# EAGLE board MyoWare_Cable_Shield.panel (EAGLE 7.4.0)
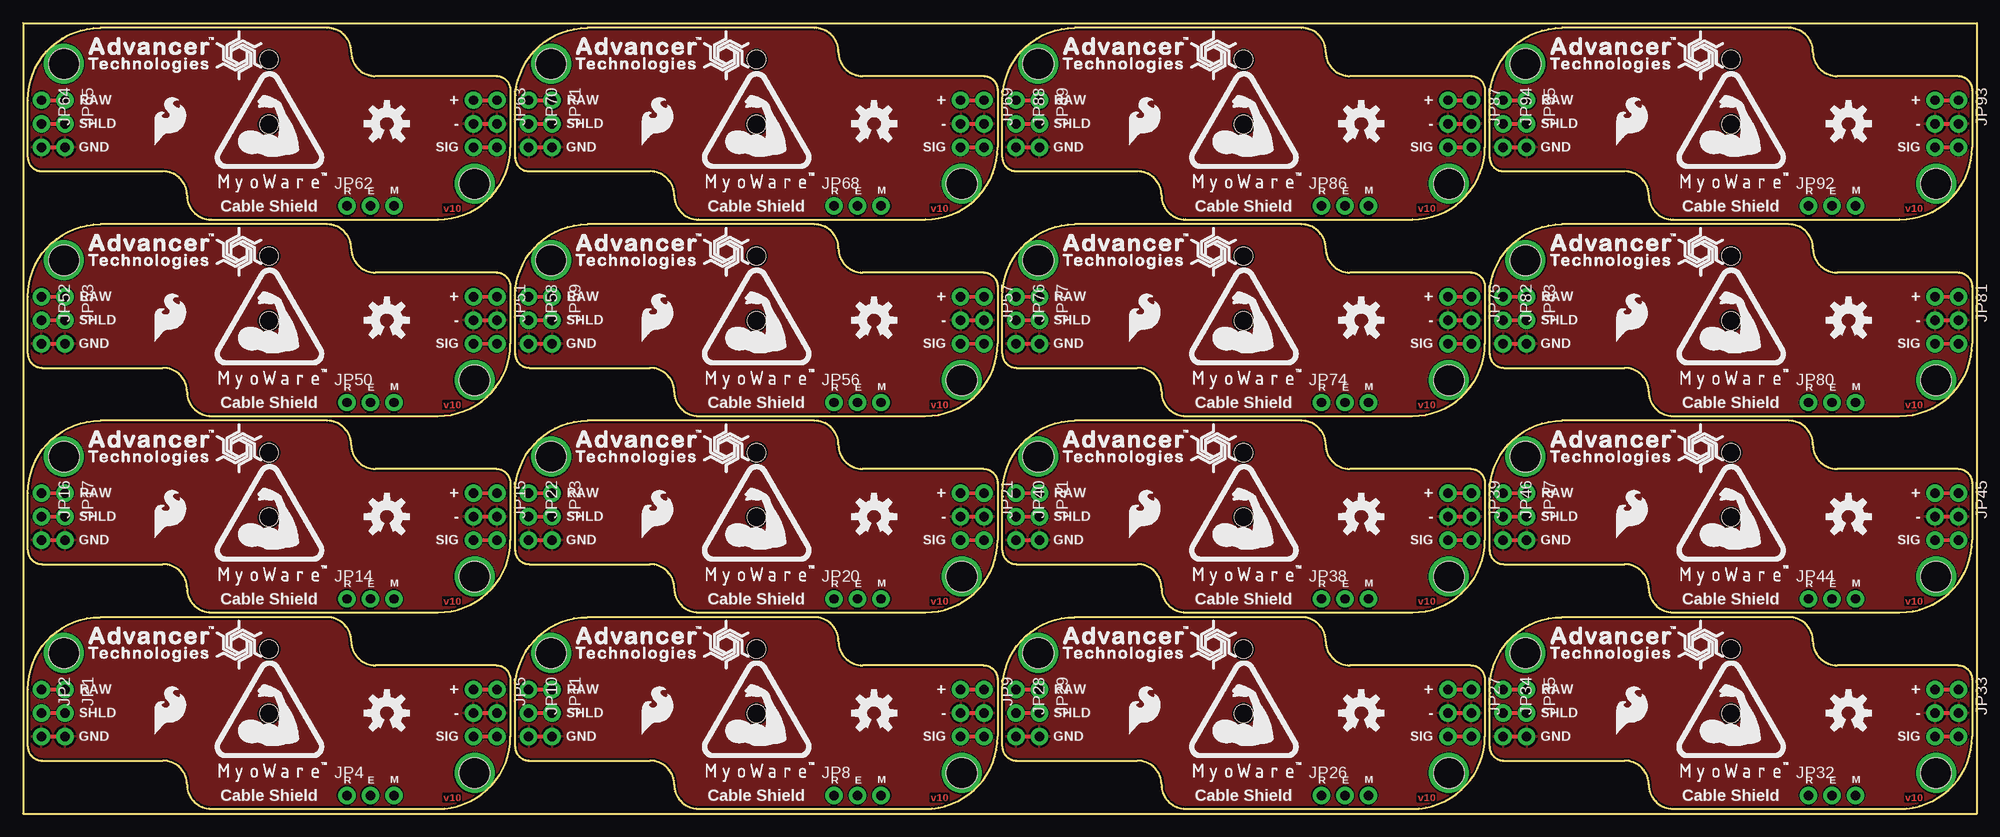
[diagram p0: board, top side]
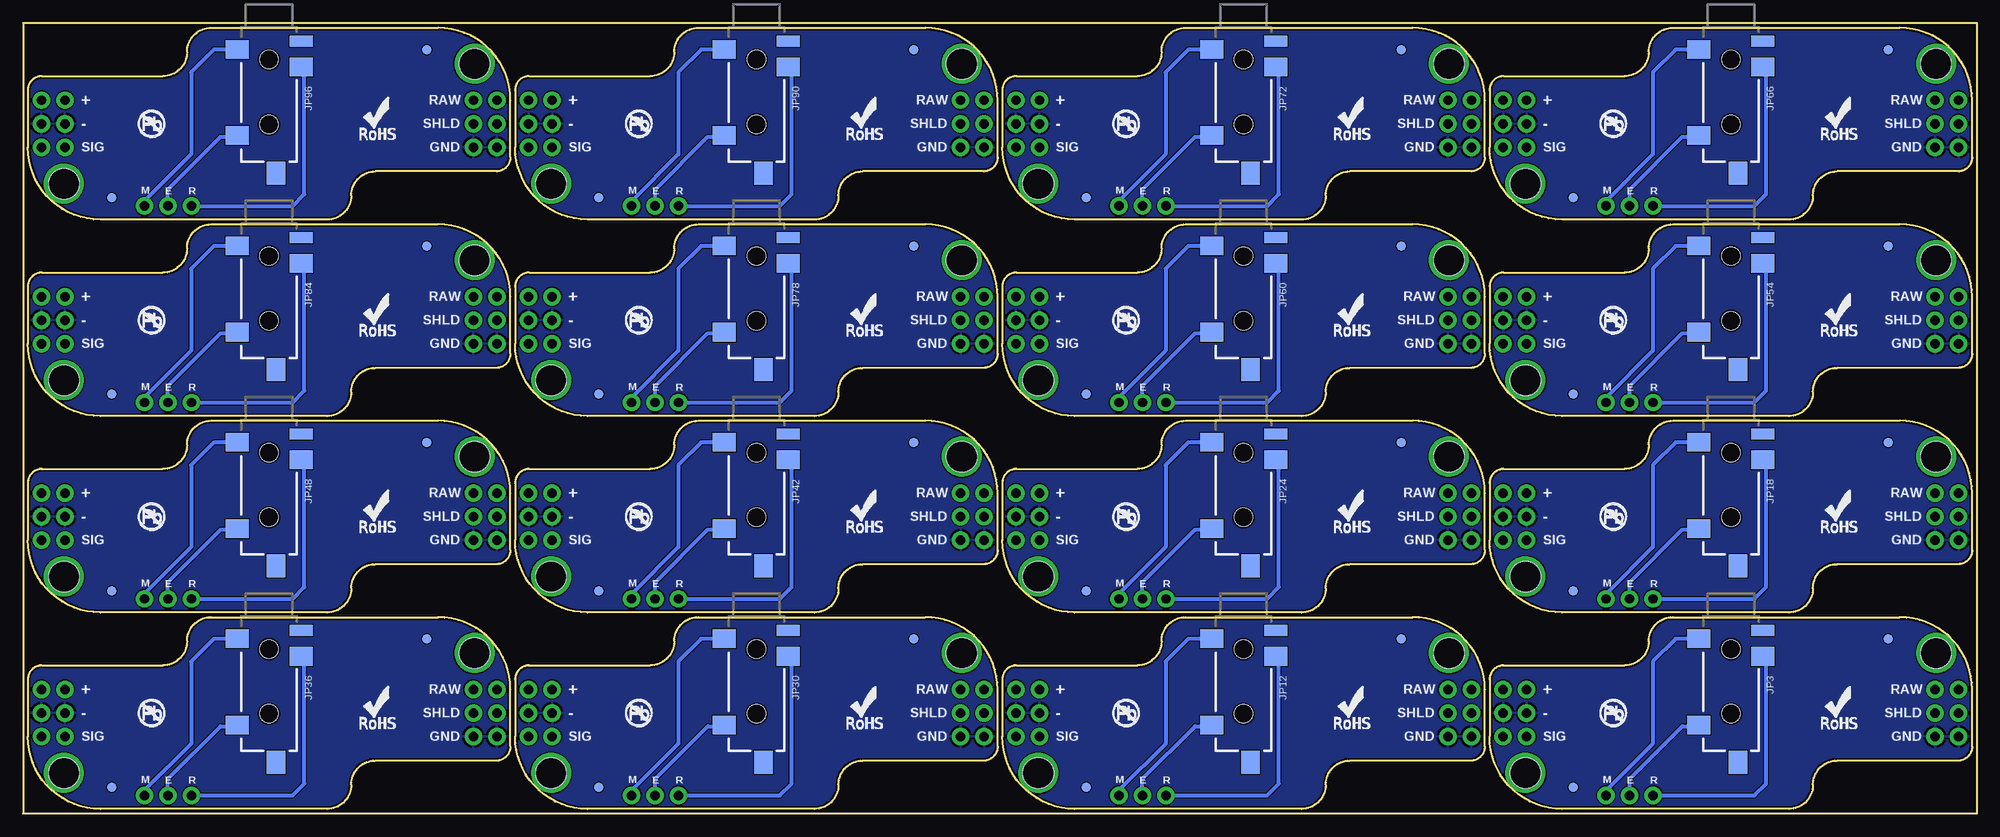
[diagram p1: board, bottom side, seen from below]

Size 210.82 x 85.34 mm. Coordinates in mm from the lower left corner, seen from the top.
Outline: 20.29,0.51 44.77,0.51 arc90 52.58,8.32 52.58,14.48 arc90 51.05,16 38,16 arc-90 35.4,18.61 arc90 32.8,21.21 8.32,21.21 arc90 0.51,13.4 0.51,7.24 arc90 2.03,5.71 15.08,5.71 arc-90 17.68,3.11 arc90 20.29,0.51
Outline: 72.87,0.51 97.34,0.51 arc90 105.16,8.32 105.16,14.48 arc90 103.63,16 90.58,16 arc-90 87.98,18.61 arc90 85.38,21.21 60.9,21.21 arc90 53.09,13.4 53.09,7.24 arc90 54.61,5.71 67.66,5.71 arc-90 70.26,3.11 arc90 72.87,0.51
Outline: 20.29,21.72 44.77,21.72 arc90 52.58,29.53 52.58,35.69 arc90 51.05,37.21 38,37.21 arc-90 35.4,39.81 arc90 32.8,42.42 8.32,42.42 arc90 0.51,34.61 0.51,28.45 arc90 2.03,26.92 15.08,26.92 arc-90 17.68,24.32 arc90 20.29,21.72
Outline: 72.87,21.72 97.34,21.72 arc90 105.16,29.53 105.16,35.69 arc90 103.63,37.21 90.58,37.21 arc-90 87.98,39.81 arc90 85.38,42.42 60.9,42.42 arc90 53.09,34.61 53.09,28.45 arc90 54.61,26.92 67.66,26.92 arc-90 70.26,24.32 arc90 72.87,21.72
Outline: 125.44,0.51 149.92,0.51 arc90 157.73,8.32 157.73,14.48 arc90 156.21,16 143.16,16 arc-90 140.56,18.61 arc90 137.95,21.21 113.47,21.21 arc90 105.66,13.4 105.66,7.24 arc90 107.19,5.71 120.24,5.71 arc-90 122.84,3.11 arc90 125.44,0.51
Outline: 178.02,0.51 202.5,0.51 arc90 210.31,8.32 210.31,14.48 arc90 208.79,16 195.74,16 arc-90 193.14,18.61 arc90 190.53,21.21 166.05,21.21 arc90 158.24,13.4 158.24,7.24 arc90 159.77,5.71 172.81,5.71 arc-90 175.42,3.11 arc90 178.02,0.51
Outline: 125.44,21.72 149.92,21.72 arc90 157.73,29.53 157.73,35.69 arc90 156.21,37.21 143.16,37.21 arc-90 140.56,39.81 arc90 137.95,42.42 113.47,42.42 arc90 105.66,34.61 105.66,28.45 arc90 107.19,26.92 120.24,26.92 arc-90 122.84,24.32 arc90 125.44,21.72
Outline: 178.02,21.72 202.5,21.72 arc90 210.31,29.53 210.31,35.69 arc90 208.79,37.21 195.74,37.21 arc-90 193.14,39.81 arc90 190.53,42.42 166.05,42.42 arc90 158.24,34.61 158.24,28.45 arc90 159.77,26.92 172.81,26.92 arc-90 175.42,24.32 arc90 178.02,21.72
Outline: 20.29,42.93 44.77,42.93 arc90 52.58,50.74 52.58,56.9 arc90 51.05,58.42 38,58.42 arc-90 35.4,61.02 arc90 32.8,63.63 8.32,63.63 arc90 0.51,55.82 0.51,49.66 arc90 2.03,48.13 15.08,48.13 arc-90 17.68,45.53 arc90 20.29,42.93
Outline: 72.87,42.93 97.34,42.93 arc90 105.16,50.74 105.16,56.9 arc90 103.63,58.42 90.58,58.42 arc-90 87.98,61.02 arc90 85.38,63.63 60.9,63.63 arc90 53.09,55.82 53.09,49.66 arc90 54.61,48.13 67.66,48.13 arc-90 70.26,45.53 arc90 72.87,42.93
Outline: 20.29,64.13 44.77,64.13 arc90 52.58,71.95 52.58,78.1 arc90 51.05,79.63 38,79.63 arc-90 35.4,82.23 arc90 32.8,84.84 8.32,84.84 arc90 0.51,77.03 0.51,70.87 arc90 2.03,69.34 15.08,69.34 arc-90 17.68,66.74 arc90 20.29,64.13
Outline: 72.87,64.13 97.34,64.13 arc90 105.16,71.95 105.16,78.1 arc90 103.63,79.63 90.58,79.63 arc-90 87.98,82.23 arc90 85.38,84.84 60.9,84.84 arc90 53.09,77.03 53.09,70.87 arc90 54.61,69.34 67.66,69.34 arc-90 70.26,66.74 arc90 72.87,64.13
Outline: 125.44,42.93 149.92,42.93 arc90 157.73,50.74 157.73,56.9 arc90 156.21,58.42 143.16,58.42 arc-90 140.56,61.02 arc90 137.95,63.63 113.47,63.63 arc90 105.66,55.82 105.66,49.66 arc90 107.19,48.13 120.24,48.13 arc-90 122.84,45.53 arc90 125.44,42.93
Outline: 178.02,42.93 202.5,42.93 arc90 210.31,50.74 210.31,56.9 arc90 208.79,58.42 195.74,58.42 arc-90 193.14,61.02 arc90 190.53,63.63 166.05,63.63 arc90 158.24,55.82 158.24,49.66 arc90 159.77,48.13 172.81,48.13 arc-90 175.42,45.53 arc90 178.02,42.93
Outline: 125.44,64.13 149.92,64.13 arc90 157.73,71.95 157.73,78.1 arc90 156.21,79.63 143.16,79.63 arc-90 140.56,82.23 arc90 137.95,84.84 113.47,84.84 arc90 105.66,77.03 105.66,70.87 arc90 107.19,69.34 120.24,69.34 arc-90 122.84,66.74 arc90 125.44,64.13
Outline: 178.02,64.13 202.5,64.13 arc90 210.31,71.95 210.31,78.1 arc90 208.79,79.63 195.74,79.63 arc-90 193.14,82.23 arc90 190.53,84.84 166.05,84.84 arc90 158.24,77.03 158.24,70.87 arc90 159.77,69.34 172.81,69.34 arc-90 175.42,66.74 arc90 178.02,64.13
Outline: 0,85.34 0,0 210.82,0 210.82,85.34 0,85.34
Copper layers (1*16): Top 0.035mm / dielectric 1.5mm / Bottom 0.035mm
Design rules "Gold_Phoenix_Standard_Spec_2_layer": minimum track width 5mil, minimum drill 6mil, track to track 5mil, track to pad 5mil, pad to pad 5mil, via to via 5mil, smd to smd 5mil, copper to edge 8mil, drill to drill 8mil, minimum pad ring 5mil, minimum via ring 5mil, stop-mask expansion 4mil, vias tented up to drill 20mil, thermal gap 10mil

## Footprints (pad centres in the part's own frame; a part is rotated, then mirrored left to right if it is on the bottom)
FIDUCIAL-1X2 = smd 1 x 1: 1 0,0
1X03_NO_SILK = drill 1.016 pad 1.88: 1 0,0; 2 2.54,0; 3 5.08,0
AUDIO-JACK-3.5MM-SMD = smd 2 x 2.5: RING 4.3,3.45; SLEEVE 2.4,-3.45; TIP 11.7,-3.45 | smd 1.2 x 2.5: RSH 1.5,3.45 | smd 2.5 x 2: TSH 15.75,0.75 | hole 2: 3.5,0; 10.5,0
STAND-OFF = hole 3.302: 0,0

## Placement (x,y rotation side)
FID1  FIDUCIAL1X2  [FIDUCIAL-1X2]  43.54,2.86 0 bottom
FID2  FIDUCIAL1X2  [FIDUCIAL-1X2]  9.54,18.86 0 bottom
FID3  FIDUCIAL1X2  [FIDUCIAL-1X2]  62.12,18.86 0 bottom
FID4  FIDUCIAL1X2  [FIDUCIAL-1X2]  96.12,2.86 0 bottom
FID5  FIDUCIAL1X2  [FIDUCIAL-1X2]  9.54,40.07 0 bottom
FID6  FIDUCIAL1X2  [FIDUCIAL-1X2]  43.54,24.07 0 bottom
FID7  FIDUCIAL1X2  [FIDUCIAL-1X2]  62.12,40.07 0 bottom
FID8  FIDUCIAL1X2  [FIDUCIAL-1X2]  96.12,24.07 0 bottom
FID9  FIDUCIAL1X2  [FIDUCIAL-1X2]  114.7,18.86 0 bottom
FID10  FIDUCIAL1X2  [FIDUCIAL-1X2]  148.7,2.86 0 bottom
FID11  FIDUCIAL1X2  [FIDUCIAL-1X2]  167.28,18.86 0 bottom
FID12  FIDUCIAL1X2  [FIDUCIAL-1X2]  201.28,2.86 0 bottom
FID13  FIDUCIAL1X2  [FIDUCIAL-1X2]  114.7,40.07 0 bottom
FID14  FIDUCIAL1X2  [FIDUCIAL-1X2]  148.7,24.07 0 bottom
FID15  FIDUCIAL1X2  [FIDUCIAL-1X2]  167.28,40.07 0 bottom
FID16  FIDUCIAL1X2  [FIDUCIAL-1X2]  201.28,24.07 0 bottom
FID17  FIDUCIAL1X2  [FIDUCIAL-1X2]  9.54,61.28 0 bottom
FID18  FIDUCIAL1X2  [FIDUCIAL-1X2]  43.54,45.28 0 bottom
FID19  FIDUCIAL1X2  [FIDUCIAL-1X2]  62.12,61.28 0 bottom
FID20  FIDUCIAL1X2  [FIDUCIAL-1X2]  96.12,45.28 0 bottom
FID21  FIDUCIAL1X2  [FIDUCIAL-1X2]  9.54,82.49 0 bottom
FID22  FIDUCIAL1X2  [FIDUCIAL-1X2]  43.54,66.49 0 bottom
FID23  FIDUCIAL1X2  [FIDUCIAL-1X2]  62.12,82.49 0 bottom
FID24  FIDUCIAL1X2  [FIDUCIAL-1X2]  96.12,66.49 0 bottom
FID25  FIDUCIAL1X2  [FIDUCIAL-1X2]  114.7,61.28 0 bottom
FID26  FIDUCIAL1X2  [FIDUCIAL-1X2]  148.7,45.28 0 bottom
FID27  FIDUCIAL1X2  [FIDUCIAL-1X2]  167.28,61.28 0 bottom
FID28  FIDUCIAL1X2  [FIDUCIAL-1X2]  201.28,45.28 0 bottom
FID29  FIDUCIAL1X2  [FIDUCIAL-1X2]  114.7,82.49 0 bottom
FID30  FIDUCIAL1X2  [FIDUCIAL-1X2]  148.7,66.49 0 bottom
FID31  FIDUCIAL1X2  [FIDUCIAL-1X2]  167.28,82.49 0 bottom
FID32  FIDUCIAL1X2  [FIDUCIAL-1X2]  201.28,66.49 0 bottom
FRAME1  FRAME-LETTER  [CREATIVE_COMMONS]  -5.21,-14.54 0 top  (outside the outline)
JP1  Power  [1X03_NO_SILK]  4.51,13.4 270 top
JP2  Power  [1X03_NO_SILK]  1.97,13.4 270 top
JP3  3.5mm Jack  [AUDIO-JACK-3.5MM-SMD]  26.54,21.27 270 bottom
JP4  Power  [1X03_NO_SILK]  34.92,1.97 0 top
JP5  Power  [1X03_NO_SILK]  51.12,13.4 270 top
JP6  Power  [1X03_NO_SILK]  48.58,13.4 270 top
JP7  Power  [1X03_NO_SILK]  101.16,13.4 270 top
JP8  Power  [1X03_NO_SILK]  87.5,1.97 0 top
JP9  Power  [1X03_NO_SILK]  103.7,13.4 270 top
JP10  Power  [1X03_NO_SILK]  54.55,13.4 270 top
JP11  Power  [1X03_NO_SILK]  57.09,13.4 270 top
JP12  3.5mm Jack  [AUDIO-JACK-3.5MM-SMD]  79.12,21.27 270 bottom
JP13  Power  [1X03_NO_SILK]  48.58,34.61 270 top
JP14  Power  [1X03_NO_SILK]  34.92,23.18 0 top
JP15  Power  [1X03_NO_SILK]  51.12,34.61 270 top
JP16  Power  [1X03_NO_SILK]  1.97,34.61 270 top
JP17  Power  [1X03_NO_SILK]  4.51,34.61 270 top
JP18  3.5mm Jack  [AUDIO-JACK-3.5MM-SMD]  26.54,42.48 270 bottom
JP19  Power  [1X03_NO_SILK]  101.16,34.61 270 top
JP20  Power  [1X03_NO_SILK]  87.5,23.18 0 top
JP21  Power  [1X03_NO_SILK]  103.7,34.61 270 top
JP22  Power  [1X03_NO_SILK]  54.55,34.61 270 top
JP23  Power  [1X03_NO_SILK]  57.09,34.61 270 top
JP24  3.5mm Jack  [AUDIO-JACK-3.5MM-SMD]  79.12,42.48 270 bottom
JP25  Power  [1X03_NO_SILK]  153.73,13.4 270 top
JP26  Power  [1X03_NO_SILK]  140.08,1.97 0 top
JP27  Power  [1X03_NO_SILK]  156.27,13.4 270 top
JP28  Power  [1X03_NO_SILK]  107.12,13.4 270 top
JP29  Power  [1X03_NO_SILK]  109.66,13.4 270 top
JP30  3.5mm Jack  [AUDIO-JACK-3.5MM-SMD]  131.7,21.27 270 bottom
JP31  Power  [1X03_NO_SILK]  206.31,13.4 270 top
JP32  Power  [1X03_NO_SILK]  192.66,1.97 0 top
JP33  Power  [1X03_NO_SILK]  208.85,13.4 270 top
JP34  Power  [1X03_NO_SILK]  159.7,13.4 270 top
JP35  Power  [1X03_NO_SILK]  162.24,13.4 270 top
JP36  3.5mm Jack  [AUDIO-JACK-3.5MM-SMD]  184.28,21.27 270 bottom
JP37  Power  [1X03_NO_SILK]  153.73,34.61 270 top
JP38  Power  [1X03_NO_SILK]  140.08,23.18 0 top
JP39  Power  [1X03_NO_SILK]  156.27,34.61 270 top
JP40  Power  [1X03_NO_SILK]  107.12,34.61 270 top
JP41  Power  [1X03_NO_SILK]  109.66,34.61 270 top
JP42  3.5mm Jack  [AUDIO-JACK-3.5MM-SMD]  131.7,42.48 270 bottom
JP43  Power  [1X03_NO_SILK]  206.31,34.61 270 top
JP44  Power  [1X03_NO_SILK]  192.66,23.18 0 top
JP45  Power  [1X03_NO_SILK]  208.85,34.61 270 top
JP46  Power  [1X03_NO_SILK]  159.7,34.61 270 top
JP47  Power  [1X03_NO_SILK]  162.24,34.61 270 top
JP48  3.5mm Jack  [AUDIO-JACK-3.5MM-SMD]  184.28,42.48 270 bottom
JP49  Power  [1X03_NO_SILK]  48.58,55.82 270 top
JP50  Power  [1X03_NO_SILK]  34.92,44.39 0 top
JP51  Power  [1X03_NO_SILK]  51.12,55.82 270 top
JP52  Power  [1X03_NO_SILK]  1.97,55.82 270 top
JP53  Power  [1X03_NO_SILK]  4.51,55.82 270 top
JP54  3.5mm Jack  [AUDIO-JACK-3.5MM-SMD]  26.54,63.69 270 bottom
JP55  Power  [1X03_NO_SILK]  101.16,55.82 270 top
JP56  Power  [1X03_NO_SILK]  87.5,44.39 0 top
JP57  Power  [1X03_NO_SILK]  103.7,55.82 270 top
JP58  Power  [1X03_NO_SILK]  54.55,55.82 270 top
JP59  Power  [1X03_NO_SILK]  57.09,55.82 270 top
JP60  3.5mm Jack  [AUDIO-JACK-3.5MM-SMD]  79.12,63.69 270 bottom
JP61  Power  [1X03_NO_SILK]  48.58,77.03 270 top
JP62  Power  [1X03_NO_SILK]  34.92,65.6 0 top
JP63  Power  [1X03_NO_SILK]  51.12,77.03 270 top
JP64  Power  [1X03_NO_SILK]  1.97,77.03 270 top
JP65  Power  [1X03_NO_SILK]  4.51,77.03 270 top
JP66  3.5mm Jack  [AUDIO-JACK-3.5MM-SMD]  26.54,84.9 270 bottom
JP67  Power  [1X03_NO_SILK]  101.16,77.03 270 top
JP68  Power  [1X03_NO_SILK]  87.5,65.6 0 top
JP69  Power  [1X03_NO_SILK]  103.7,77.03 270 top
JP70  Power  [1X03_NO_SILK]  54.55,77.03 270 top
JP71  Power  [1X03_NO_SILK]  57.09,77.03 270 top
JP72  3.5mm Jack  [AUDIO-JACK-3.5MM-SMD]  79.12,84.9 270 bottom
JP73  Power  [1X03_NO_SILK]  153.73,55.82 270 top
JP74  Power  [1X03_NO_SILK]  140.08,44.39 0 top
JP75  Power  [1X03_NO_SILK]  156.27,55.82 270 top
JP76  Power  [1X03_NO_SILK]  107.12,55.82 270 top
JP77  Power  [1X03_NO_SILK]  109.66,55.82 270 top
JP78  3.5mm Jack  [AUDIO-JACK-3.5MM-SMD]  131.7,63.69 270 bottom
JP79  Power  [1X03_NO_SILK]  206.31,55.82 270 top
JP80  Power  [1X03_NO_SILK]  192.66,44.39 0 top
JP81  Power  [1X03_NO_SILK]  208.85,55.82 270 top
JP82  Power  [1X03_NO_SILK]  159.7,55.82 270 top
JP83  Power  [1X03_NO_SILK]  162.24,55.82 270 top
JP84  3.5mm Jack  [AUDIO-JACK-3.5MM-SMD]  184.28,63.69 270 bottom
JP85  Power  [1X03_NO_SILK]  153.73,77.03 270 top
JP86  Power  [1X03_NO_SILK]  140.08,65.6 0 top
JP87  Power  [1X03_NO_SILK]  156.27,77.03 270 top
JP88  Power  [1X03_NO_SILK]  107.12,77.03 270 top
JP89  Power  [1X03_NO_SILK]  109.66,77.03 270 top
JP90  3.5mm Jack  [AUDIO-JACK-3.5MM-SMD]  131.7,84.9 270 bottom
JP91  Power  [1X03_NO_SILK]  206.31,77.03 270 top
JP92  Power  [1X03_NO_SILK]  192.66,65.6 0 top
JP93  Power  [1X03_NO_SILK]  208.85,77.03 270 top
JP94  Power  [1X03_NO_SILK]  159.7,77.03 270 top
JP95  Power  [1X03_NO_SILK]  162.24,77.03 270 top
JP96  3.5mm Jack  [AUDIO-JACK-3.5MM-SMD]  184.28,84.9 270 bottom
LOGO  [MYOWARE_LOGO]  26.54,9.97 0 top
LOGO1  SFE_LOGO_FLAME.2_INCH  [SFE_LOGO_FLAME_.2]  13.84,8.32 0 top
LOGO2  OSHW-LOGOM  [OSHW-LOGO-M]  39.24,10.86 0 top
LOGO3  [MYOWARE_LOGO]  79.12,9.97 0 top
LOGO4  OSHW-LOGOM  [OSHW-LOGO-M]  91.82,10.86 0 top
LOGO5  SFE_LOGO_FLAME.2_INCH  [SFE_LOGO_FLAME_.2]  66.42,8.32 0 top
LOGO6  [MYOWARE_LOGO]  26.54,31.18 0 top
LOGO7  OSHW-LOGOM  [OSHW-LOGO-M]  39.24,32.07 0 top
LOGO8  SFE_LOGO_FLAME.2_INCH  [SFE_LOGO_FLAME_.2]  13.84,29.53 0 top
LOGO9  [MYOWARE_LOGO]  79.12,31.18 0 top
LOGO10  OSHW-LOGOM  [OSHW-LOGO-M]  91.82,32.07 0 top
LOGO11  SFE_LOGO_FLAME.2_INCH  [SFE_LOGO_FLAME_.2]  66.42,29.53 0 top
LOGO12  [MYOWARE_LOGO]  131.7,9.97 0 top
LOGO13  OSHW-LOGOM  [OSHW-LOGO-M]  144.4,10.86 0 top
LOGO14  SFE_LOGO_FLAME.2_INCH  [SFE_LOGO_FLAME_.2]  119,8.32 0 top
LOGO15  [MYOWARE_LOGO]  184.28,9.97 0 top
LOGO16  OSHW-LOGOM  [OSHW-LOGO-M]  196.98,10.86 0 top
LOGO17  SFE_LOGO_FLAME.2_INCH  [SFE_LOGO_FLAME_.2]  171.58,8.32 0 top
LOGO18  [MYOWARE_LOGO]  131.7,31.18 0 top
LOGO19  OSHW-LOGOM  [OSHW-LOGO-M]  144.4,32.07 0 top
LOGO20  SFE_LOGO_FLAME.2_INCH  [SFE_LOGO_FLAME_.2]  119,29.53 0 top
LOGO21  [MYOWARE_LOGO]  184.28,31.18 0 top
LOGO22  OSHW-LOGOM  [OSHW-LOGO-M]  196.98,32.07 0 top
LOGO23  SFE_LOGO_FLAME.2_INCH  [SFE_LOGO_FLAME_.2]  171.58,29.53 0 top
LOGO24  [MYOWARE_LOGO]  26.54,52.39 0 top
LOGO25  OSHW-LOGOM  [OSHW-LOGO-M]  39.24,53.28 0 top
LOGO26  SFE_LOGO_FLAME.2_INCH  [SFE_LOGO_FLAME_.2]  13.84,50.74 0 top
LOGO27  [MYOWARE_LOGO]  79.12,52.39 0 top
LOGO28  OSHW-LOGOM  [OSHW-LOGO-M]  91.82,53.28 0 top
LOGO29  SFE_LOGO_FLAME.2_INCH  [SFE_LOGO_FLAME_.2]  66.42,50.74 0 top
LOGO30  [MYOWARE_LOGO]  26.54,73.6 0 top
LOGO31  OSHW-LOGOM  [OSHW-LOGO-M]  39.24,74.49 0 top
LOGO32  SFE_LOGO_FLAME.2_INCH  [SFE_LOGO_FLAME_.2]  13.84,71.95 0 top
LOGO33  [MYOWARE_LOGO]  79.12,73.6 0 top
LOGO34  OSHW-LOGOM  [OSHW-LOGO-M]  91.82,74.49 0 top
LOGO35  SFE_LOGO_FLAME.2_INCH  [SFE_LOGO_FLAME_.2]  66.42,71.95 0 top
LOGO36  [MYOWARE_LOGO]  131.7,52.39 0 top
LOGO37  OSHW-LOGOM  [OSHW-LOGO-M]  144.4,53.28 0 top
LOGO38  SFE_LOGO_FLAME.2_INCH  [SFE_LOGO_FLAME_.2]  119,50.74 0 top
LOGO39  [MYOWARE_LOGO]  184.28,52.39 0 top
LOGO40  OSHW-LOGOM  [OSHW-LOGO-M]  196.98,53.28 0 top
LOGO41  SFE_LOGO_FLAME.2_INCH  [SFE_LOGO_FLAME_.2]  171.58,50.74 0 top
LOGO42  [MYOWARE_LOGO]  131.7,73.6 0 top
LOGO43  OSHW-LOGOM  [OSHW-LOGO-M]  144.4,74.49 0 top
LOGO44  SFE_LOGO_FLAME.2_INCH  [SFE_LOGO_FLAME_.2]  119,71.95 0 top
LOGO45  [MYOWARE_LOGO]  184.28,73.6 0 top
LOGO46  OSHW-LOGOM  [OSHW-LOGO-M]  196.98,74.49 0 top
LOGO47  SFE_LOGO_FLAME.2_INCH  [SFE_LOGO_FLAME_.2]  171.58,71.95 0 top
SPIRAL  [SPIRAL_LOGO_60%]  23.33,18.24 0 top
SPIRAL1  [SPIRAL_LOGO_60%]  75.91,18.24 0 top
SPIRAL2  [SPIRAL_LOGO_60%]  23.33,39.45 0 top
SPIRAL3  [SPIRAL_LOGO_60%]  75.91,39.45 0 top
SPIRAL4  [SPIRAL_LOGO_60%]  128.49,18.24 0 top
SPIRAL5  [SPIRAL_LOGO_60%]  181.06,18.24 0 top
SPIRAL6  [SPIRAL_LOGO_60%]  128.49,39.45 0 top
SPIRAL7  [SPIRAL_LOGO_60%]  181.06,39.45 0 top
SPIRAL8  [SPIRAL_LOGO_60%]  23.33,60.66 0 top
SPIRAL9  [SPIRAL_LOGO_60%]  75.91,60.66 0 top
SPIRAL10  [SPIRAL_LOGO_60%]  23.33,81.86 0 top
SPIRAL11  [SPIRAL_LOGO_60%]  75.91,81.86 0 top
SPIRAL12  [SPIRAL_LOGO_60%]  128.49,60.66 0 top
SPIRAL13  [SPIRAL_LOGO_60%]  181.06,60.66 0 top
SPIRAL14  [SPIRAL_LOGO_60%]  128.49,81.86 0 top
SPIRAL15  [SPIRAL_LOGO_60%]  181.06,81.86 0 top
STANDOFF1  STAND-OFF  [STAND-OFF]  4.38,17.34 0 top
STANDOFF2  STAND-OFF  [STAND-OFF]  48.7,4.38 0 top
STANDOFF3  STAND-OFF  [STAND-OFF]  56.96,17.34 0 top
STANDOFF4  STAND-OFF  [STAND-OFF]  101.28,4.38 0 top
STANDOFF5  STAND-OFF  [STAND-OFF]  4.38,38.54 0 top
STANDOFF6  STAND-OFF  [STAND-OFF]  48.7,25.59 0 top
STANDOFF7  STAND-OFF  [STAND-OFF]  56.96,38.54 0 top
STANDOFF8  STAND-OFF  [STAND-OFF]  101.28,25.59 0 top
STANDOFF9  STAND-OFF  [STAND-OFF]  109.54,17.34 0 top
STANDOFF10  STAND-OFF  [STAND-OFF]  153.86,4.38 0 top
STANDOFF11  STAND-OFF  [STAND-OFF]  162.12,17.34 0 top
STANDOFF12  STAND-OFF  [STAND-OFF]  206.44,4.38 0 top
STANDOFF13  STAND-OFF  [STAND-OFF]  109.54,38.54 0 top
STANDOFF14  STAND-OFF  [STAND-OFF]  153.86,25.59 0 top
STANDOFF15  STAND-OFF  [STAND-OFF]  162.12,38.54 0 top
STANDOFF16  STAND-OFF  [STAND-OFF]  206.44,25.59 0 top
STANDOFF17  STAND-OFF  [STAND-OFF]  4.38,59.75 0 top
STANDOFF18  STAND-OFF  [STAND-OFF]  48.7,46.8 0 top
STANDOFF19  STAND-OFF  [STAND-OFF]  56.96,59.75 0 top
STANDOFF20  STAND-OFF  [STAND-OFF]  101.28,46.8 0 top
STANDOFF21  STAND-OFF  [STAND-OFF]  4.38,80.96 0 top
STANDOFF22  STAND-OFF  [STAND-OFF]  48.7,68.01 0 top
STANDOFF23  STAND-OFF  [STAND-OFF]  56.96,80.96 0 top
STANDOFF24  STAND-OFF  [STAND-OFF]  101.28,68.01 0 top
STANDOFF25  STAND-OFF  [STAND-OFF]  109.54,59.75 0 top
STANDOFF26  STAND-OFF  [STAND-OFF]  153.86,46.8 0 top
STANDOFF27  STAND-OFF  [STAND-OFF]  162.12,59.75 0 top
STANDOFF28  STAND-OFF  [STAND-OFF]  206.44,46.8 0 top
STANDOFF29  STAND-OFF  [STAND-OFF]  109.54,80.96 0 top
STANDOFF30  STAND-OFF  [STAND-OFF]  153.86,68.01 0 top
STANDOFF31  STAND-OFF  [STAND-OFF]  162.12,80.96 0 top
STANDOFF32  STAND-OFF  [STAND-OFF]  206.44,68.01 0 top
U$1  [NO_PB_LOGO_0.120]  93.53,8.95 0 bottom
U$2  [ADVANCER_LOGO]  66.03,18.08 0 top
U$3  [ROHS_LOGO_0.18_IN]  16.99,9.02 0 bottom
U$4  [ROHS_LOGO_0.18_IN]  69.56,9.02 0 bottom
U$5  [NO_PB_LOGO_0.120]  40.95,8.95 0 bottom
U$6  [ADVANCER_LOGO]  13.46,18.08 0 top
U$7  [NO_PB_LOGO_0.120]  40.95,30.16 0 bottom
U$8  [ADVANCER_LOGO]  13.46,39.29 0 top
U$9  [ROHS_LOGO_0.18_IN]  16.99,30.23 0 bottom
U$10  [NO_PB_LOGO_0.120]  93.53,30.16 0 bottom
U$11  [ADVANCER_LOGO]  66.03,39.29 0 top
U$12  [ROHS_LOGO_0.18_IN]  69.56,30.23 0 bottom
U$13  [NO_PB_LOGO_0.120]  146.11,8.95 0 bottom
U$14  [ADVANCER_LOGO]  118.61,18.08 0 top
U$15  [ROHS_LOGO_0.18_IN]  122.14,9.02 0 bottom
U$16  [NO_PB_LOGO_0.120]  198.69,8.95 0 bottom
U$17  [ADVANCER_LOGO]  171.19,18.08 0 top
U$18  [ROHS_LOGO_0.18_IN]  174.72,9.02 0 bottom
U$19  [NO_PB_LOGO_0.120]  146.11,30.16 0 bottom
U$20  [ADVANCER_LOGO]  118.61,39.29 0 top
U$21  [ROHS_LOGO_0.18_IN]  122.14,30.23 0 bottom
U$22  [NO_PB_LOGO_0.120]  198.69,30.16 0 bottom
U$23  [ADVANCER_LOGO]  171.19,39.29 0 top
U$24  [ROHS_LOGO_0.18_IN]  174.72,30.23 0 bottom
U$25  [NO_PB_LOGO_0.120]  40.95,51.37 0 bottom
U$26  [ADVANCER_LOGO]  13.46,60.5 0 top
U$27  [ROHS_LOGO_0.18_IN]  16.99,51.44 0 bottom
U$28  [NO_PB_LOGO_0.120]  93.53,51.37 0 bottom
U$29  [ADVANCER_LOGO]  66.03,60.5 0 top
U$30  [ROHS_LOGO_0.18_IN]  69.56,51.44 0 bottom
U$31  [NO_PB_LOGO_0.120]  40.95,72.58 0 bottom
U$32  [ADVANCER_LOGO]  13.46,81.71 0 top
U$33  [ROHS_LOGO_0.18_IN]  16.99,72.64 0 bottom
U$34  [NO_PB_LOGO_0.120]  93.53,72.58 0 bottom
U$35  [ADVANCER_LOGO]  66.03,81.71 0 top
U$36  [ROHS_LOGO_0.18_IN]  69.56,72.64 0 bottom
U$37  [NO_PB_LOGO_0.120]  146.11,51.37 0 bottom
U$38  [ADVANCER_LOGO]  118.61,60.5 0 top
U$39  [ROHS_LOGO_0.18_IN]  122.14,51.44 0 bottom
U$40  [NO_PB_LOGO_0.120]  198.69,51.37 0 bottom
U$41  [ADVANCER_LOGO]  171.19,60.5 0 top
U$42  [ROHS_LOGO_0.18_IN]  174.72,51.44 0 bottom
U$43  [NO_PB_LOGO_0.120]  146.11,72.58 0 bottom
U$44  [ADVANCER_LOGO]  118.61,81.71 0 top
U$45  [ROHS_LOGO_0.18_IN]  122.14,72.64 0 bottom
U$46  [NO_PB_LOGO_0.120]  198.69,72.58 0 bottom
U$47  [ADVANCER_LOGO]  171.19,81.71 0 top
U$48  [ROHS_LOGO_0.18_IN]  174.72,72.64 0 bottom

## Library data of the parts
FID1-FID32 FRAME1 LOGO1 LOGO2 LOGO4 LOGO5 LOGO7 LOGO8 LOGO10 LOGO11 LOGO13 LOGO14 LOGO16 LOGO17 LOGO19 LOGO20 LOGO22 LOGO23 LOGO25 LOGO26 LOGO28 LOGO29 LOGO31 LOGO32 LOGO34 LOGO35 LOGO37 LOGO38 LOGO40 LOGO41 LOGO43 LOGO44 LOGO46 LOGO47 U$1 U$3-U$5 U$7 U$9 U$10 U$12 U$13 U$15 U$16 U$18 U$19 U$21 U$22 U$24 U$25 U$27 U$28 U$30 U$31 U$33 U$34 U$36 U$37 U$39 U$40 U$42 U$43 U$45 U$46 U$48 = SparkFun-Aesthetics
JP1 JP2 JP4-JP11 JP13-JP17 JP19-JP23 JP25-JP29 JP31-JP35 JP37-JP41 JP43-JP47 JP49-JP53 JP55-JP59 JP61-JP65 JP67-JP71 JP73-JP77 JP79-JP83 JP85-JP89 JP91-JP95 = SparkFun-Connectors
JP3 JP12 JP18 JP24 JP30 JP36 JP42 JP48 JP54 JP60 JP66 JP72 JP78 JP84 JP90 JP96 = SparkFun-Connectors; PROD_ID: CONN-10353
LOGO LOGO3 LOGO6 LOGO9 LOGO12 LOGO15 LOGO18 LOGO21 LOGO24 LOGO27 LOGO30 LOGO33 LOGO36 LOGO39 LOGO42 LOGO45 SPIRAL SPIRAL1-SPIRAL15 U$2 U$6 U$8 U$11 U$14 U$17 U$20 U$23 U$26 U$29 U$32 U$35 U$38 U$41 U$44 U$47 = advancer-technologies
STANDOFF1-STANDOFF32 = SparkFun-Electromechanical

## Nets
END: JP3.TIP JP4.2
END1: JP8.2 JP12.TIP
END2: JP14.2 JP18.TIP
END3: JP20.2 JP24.TIP
END4: JP26.2 JP30.TIP
END5: JP32.2 JP36.TIP
END6: JP38.2 JP42.TIP
END7: JP44.2 JP48.TIP
END8: JP50.2 JP54.TIP
END9: JP56.2 JP60.TIP
END10: JP62.2 JP66.TIP
END11: JP68.2 JP72.TIP
END12: JP74.2 JP78.TIP
END13: JP80.2 JP84.TIP
END14: JP86.2 JP90.TIP
END15: JP92.2 JP96.TIP
GND: JP1.3 JP2.3 JP5.2 JP6.2
GND1: JP7.2 JP9.2 JP10.3 JP11.3
GND2: JP13.2 JP15.2 JP16.3 JP17.3
GND3: JP19.2 JP21.2 JP22.3 JP23.3
GND4: JP25.2 JP27.2 JP28.3 JP29.3
GND5: JP31.2 JP33.2 JP34.3 JP35.3
GND6: JP37.2 JP39.2 JP40.3 JP41.3
GND7: JP43.2 JP45.2 JP46.3 JP47.3
GND8: JP49.2 JP51.2 JP52.3 JP53.3
GND9: JP55.2 JP57.2 JP58.3 JP59.3
GND10: JP61.2 JP63.2 JP64.3 JP65.3
GND11: JP67.2 JP69.2 JP70.3 JP71.3
GND12: JP73.2 JP75.2 JP76.3 JP77.3
GND13: JP79.2 JP81.2 JP82.3 JP83.3
GND14: JP85.2 JP87.2 JP88.3 JP89.3
GND15: JP91.2 JP93.2 JP94.3 JP95.3
MID: JP3.SLEEVE JP4.3
MID1: JP8.3 JP12.SLEEVE
MID2: JP14.3 JP18.SLEEVE
MID3: JP20.3 JP24.SLEEVE
MID4: JP26.3 JP30.SLEEVE
MID5: JP32.3 JP36.SLEEVE
MID6: JP38.3 JP42.SLEEVE
MID7: JP44.3 JP48.SLEEVE
MID8: JP50.3 JP54.SLEEVE
MID9: JP56.3 JP60.SLEEVE
MID10: JP62.3 JP66.SLEEVE
MID11: JP68.3 JP72.SLEEVE
MID12: JP74.3 JP78.SLEEVE
MID13: JP80.3 JP84.SLEEVE
MID14: JP86.3 JP90.SLEEVE
MID15: JP92.3 JP96.SLEEVE
RAW: JP1.1 JP2.1
RAW1: JP10.1 JP11.1
RAW2: JP16.1 JP17.1
RAW3: JP22.1 JP23.1
RAW4: JP28.1 JP29.1
RAW5: JP34.1 JP35.1
RAW6: JP40.1 JP41.1
RAW7: JP46.1 JP47.1
RAW8: JP52.1 JP53.1
RAW9: JP58.1 JP59.1
RAW10: JP64.1 JP65.1
RAW11: JP70.1 JP71.1
RAW12: JP76.1 JP77.1
RAW13: JP82.1 JP83.1
RAW14: JP88.1 JP89.1
RAW15: JP94.1 JP95.1
SHIELD: JP1.2 JP2.2
SHIELD1: JP10.2 JP11.2
SHIELD2: JP16.2 JP17.2
SHIELD3: JP22.2 JP23.2
SHIELD4: JP28.2 JP29.2
SHIELD5: JP34.2 JP35.2
SHIELD6: JP40.2 JP41.2
SHIELD7: JP46.2 JP47.2
SHIELD8: JP52.2 JP53.2
SHIELD9: JP58.2 JP59.2
SHIELD10: JP64.2 JP65.2
SHIELD11: JP70.2 JP71.2
SHIELD12: JP76.2 JP77.2
SHIELD13: JP82.2 JP83.2
SHIELD14: JP88.2 JP89.2
SHIELD15: JP94.2 JP95.2
SIG: JP5.3 JP6.3
SIG1: JP7.3 JP9.3
SIG2: JP13.3 JP15.3
SIG3: JP19.3 JP21.3
SIG4: JP25.3 JP27.3
SIG5: JP31.3 JP33.3
SIG6: JP37.3 JP39.3
SIG7: JP43.3 JP45.3
SIG8: JP49.3 JP51.3
SIG9: JP55.3 JP57.3
SIG10: JP61.3 JP63.3
SIG11: JP67.3 JP69.3
SIG12: JP73.3 JP75.3
SIG13: JP79.3 JP81.3
SIG14: JP85.3 JP87.3
SIG15: JP91.3 JP93.3
VCC: JP5.1 JP6.1
VCC1: JP7.1 JP9.1
VCC2: JP13.1 JP15.1
VCC3: JP19.1 JP21.1
VCC4: JP25.1 JP27.1
VCC5: JP31.1 JP33.1
VCC6: JP37.1 JP39.1
VCC7: JP43.1 JP45.1
VCC8: JP49.1 JP51.1
VCC9: JP55.1 JP57.1
VCC10: JP61.1 JP63.1
VCC11: JP67.1 JP69.1
VCC12: JP73.1 JP75.1
VCC13: JP79.1 JP81.1
VCC14: JP85.1 JP87.1
VCC15: JP91.1 JP93.1
VREF: JP3.RING JP4.1
VREF1: JP8.1 JP12.RING
VREF2: JP14.1 JP18.RING
VREF3: JP20.1 JP24.RING
VREF4: JP26.1 JP30.RING
VREF5: JP32.1 JP36.RING
VREF6: JP38.1 JP42.RING
VREF7: JP44.1 JP48.RING
VREF8: JP50.1 JP54.RING
VREF9: JP56.1 JP60.RING
VREF10: JP62.1 JP66.RING
VREF11: JP68.1 JP72.RING
VREF12: JP74.1 JP78.RING
VREF13: JP80.1 JP84.RING
VREF14: JP86.1 JP90.RING
VREF15: JP92.1 JP96.RING

## Tracks (layer width: path | path; a pad name or v marks a point on that pad's centre or on a via)
END
  Bottom 0.406: JP3.TIP 29.99,9.44 31.77,9.44 37.47,3.75 JP4.2
END1
  Bottom 0.406: JP12.TIP 82.57,9.44 84.35,9.44 90.04,3.75 JP8.2
END2
  Bottom 0.406: JP18.TIP 29.99,30.65 31.77,30.65 37.47,24.96 JP14.2
END3
  Bottom 0.406: JP24.TIP 82.57,30.65 84.35,30.65 90.04,24.96 JP20.2
END4
  Bottom 0.406: JP30.TIP 135.15,9.44 136.92,9.44 142.62,3.75 JP26.2
END5
  Bottom 0.406: JP36.TIP 187.73,9.44 189.5,9.44 195.2,3.75 JP32.2
END6
  Bottom 0.406: JP42.TIP 135.15,30.65 136.92,30.65 142.62,24.96 JP38.2
END7
  Bottom 0.406: JP48.TIP 187.73,30.65 189.5,30.65 195.2,24.96 JP44.2
END8
  Bottom 0.406: JP54.TIP 29.99,51.86 31.77,51.86 37.47,46.16 JP50.2
END9
  Bottom 0.406: JP60.TIP 82.57,51.86 84.35,51.86 90.04,46.16 JP56.2
END10
  Bottom 0.406: JP66.TIP 29.99,73.07 31.77,73.07 37.47,67.37 JP62.2
END11
  Bottom 0.406: JP72.TIP 82.57,73.07 84.35,73.07 90.04,67.37 JP68.2
END12
  Bottom 0.406: JP78.TIP 135.15,51.86 136.92,51.86 142.62,46.16 JP74.2
END13
  Bottom 0.406: JP84.TIP 187.73,51.86 189.5,51.86 195.2,46.16 JP80.2
END14
  Bottom 0.406: JP90.TIP 135.15,73.07 136.92,73.07 142.62,67.37 JP86.2
END15
  Bottom 0.406: JP96.TIP 187.73,73.07 189.5,73.07 195.2,67.37 JP92.2
GND
  Top 0.406: JP6.2 JP5.2 | JP2.3 JP1.3
  pour Top: 0.51,0.51 52.58,0.51 52.58,21.21 0.51,21.21
  pour Bottom: 0.51,0.51 52.58,0.51 52.58,21.21 0.51,21.21
GND1
  Top 0.406: JP7.2 JP9.2 | JP10.3 JP11.3
  pour Top: 53.09,0.51 105.16,0.51 105.16,21.21 53.09,21.21
  pour Bottom: 53.09,0.51 105.16,0.51 105.16,21.21 53.09,21.21
GND2
  Top 0.406: JP13.2 JP15.2 | JP16.3 JP17.3
  pour Top: 0.51,21.72 52.58,21.72 52.58,42.42 0.51,42.42
  pour Bottom: 0.51,21.72 52.58,21.72 52.58,42.42 0.51,42.42
GND3
  Top 0.406: JP19.2 JP21.2 | JP22.3 JP23.3
  pour Top: 53.09,21.72 105.16,21.72 105.16,42.42 53.09,42.42
  pour Bottom: 53.09,21.72 105.16,21.72 105.16,42.42 53.09,42.42
GND4
  Top 0.406: JP25.2 JP27.2 | JP28.3 JP29.3
  pour Top: 105.66,0.51 157.73,0.51 157.73,21.21 105.66,21.21
  pour Bottom: 105.66,0.51 157.73,0.51 157.73,21.21 105.66,21.21
GND5
  Top 0.406: JP31.2 JP33.2 | JP34.3 JP35.3
  pour Top: 158.24,0.51 210.31,0.51 210.31,21.21 158.24,21.21
  pour Bottom: 158.24,0.51 210.31,0.51 210.31,21.21 158.24,21.21
GND6
  Top 0.406: JP37.2 JP39.2 | JP40.3 JP41.3
  pour Top: 105.66,21.72 157.73,21.72 157.73,42.42 105.66,42.42
  pour Bottom: 105.66,21.72 157.73,21.72 157.73,42.42 105.66,42.42
GND7
  Top 0.406: JP43.2 JP45.2 | JP46.3 JP47.3
  pour Top: 158.24,21.72 210.31,21.72 210.31,42.42 158.24,42.42
  pour Bottom: 158.24,21.72 210.31,21.72 210.31,42.42 158.24,42.42
GND8
  Top 0.406: JP49.2 JP51.2 | JP52.3 JP53.3
  pour Top: 0.51,42.93 52.58,42.93 52.58,63.63 0.51,63.63
  pour Bottom: 0.51,42.93 52.58,42.93 52.58,63.63 0.51,63.63
GND9
  Top 0.406: JP55.2 JP57.2 | JP58.3 JP59.3
  pour Top: 53.09,42.93 105.16,42.93 105.16,63.63 53.09,63.63
  pour Bottom: 53.09,42.93 105.16,42.93 105.16,63.63 53.09,63.63
GND10
  Top 0.406: JP61.2 JP63.2 | JP64.3 JP65.3
  pour Top: 0.51,64.13 52.58,64.13 52.58,84.84 0.51,84.84
  pour Bottom: 0.51,64.13 52.58,64.13 52.58,84.84 0.51,84.84
GND11
  Top 0.406: JP67.2 JP69.2 | JP70.3 JP71.3
  pour Top: 53.09,64.13 105.16,64.13 105.16,84.84 53.09,84.84
  pour Bottom: 53.09,64.13 105.16,64.13 105.16,84.84 53.09,84.84
GND12
  Top 0.406: JP73.2 JP75.2 | JP76.3 JP77.3
  pour Top: 105.66,42.93 157.73,42.93 157.73,63.63 105.66,63.63
  pour Bottom: 105.66,42.93 157.73,42.93 157.73,63.63 105.66,63.63
GND13
  Top 0.406: JP79.2 JP81.2 | JP82.3 JP83.3
  pour Top: 158.24,42.93 210.31,42.93 210.31,63.63 158.24,63.63
  pour Bottom: 158.24,42.93 210.31,42.93 210.31,63.63 158.24,63.63
GND14
  Top 0.406: JP85.2 JP87.2 | JP88.3 JP89.3
  pour Top: 105.66,64.13 157.73,64.13 157.73,84.84 105.66,84.84
  pour Bottom: 105.66,64.13 157.73,64.13 157.73,84.84 105.66,84.84
GND15
  Top 0.406: JP91.2 JP93.2 | JP94.3 JP95.3
  pour Top: 158.24,64.13 210.31,64.13 210.31,84.84 158.24,84.84
  pour Bottom: 158.24,64.13 210.31,64.13 210.31,84.84 158.24,84.84
MID
  Bottom 0.406: JP3.SLEEVE 32.5,18.87 34.96,16.41 34.96,7.56 40,2.51 JP4.3
MID1
  Bottom 0.406: JP12.SLEEVE 85.08,18.87 87.53,16.41 87.53,7.56 92.58,2.51 JP8.3
MID2
  Bottom 0.406: JP18.SLEEVE 32.5,40.08 34.96,37.62 34.96,28.77 40,23.72 JP14.3
MID3
  Bottom 0.406: JP24.SLEEVE 85.08,40.08 87.53,37.62 87.53,28.77 92.58,23.72 JP20.3
MID4
  Bottom 0.406: JP30.SLEEVE 137.66,18.87 140.11,16.41 140.11,7.56 145.16,2.51 JP26.3
MID5
  Bottom 0.406: JP36.SLEEVE 190.23,18.87 192.69,16.41 192.69,7.56 197.74,2.51 JP32.3
MID6
  Bottom 0.406: JP42.SLEEVE 137.66,40.08 140.11,37.62 140.11,28.77 145.16,23.72 JP38.3
MID7
  Bottom 0.406: JP48.SLEEVE 190.23,40.08 192.69,37.62 192.69,28.77 197.74,23.72 JP44.3
MID8
  Bottom 0.406: JP54.SLEEVE 32.5,61.29 34.96,58.83 34.96,49.97 40,44.93 JP50.3
MID9
  Bottom 0.406: JP60.SLEEVE 85.08,61.29 87.53,58.83 87.53,49.97 92.58,44.93 JP56.3
MID10
  Bottom 0.406: JP66.SLEEVE 32.5,82.5 34.96,80.04 34.96,71.18 40,66.14 JP62.3
MID11
  Bottom 0.406: JP72.SLEEVE 85.08,82.5 87.53,80.04 87.53,71.18 92.58,66.14 JP68.3
MID12
  Bottom 0.406: JP78.SLEEVE 137.66,61.29 140.11,58.83 140.11,49.97 145.16,44.93 JP74.3
MID13
  Bottom 0.406: JP84.SLEEVE 190.23,61.29 192.69,58.83 192.69,49.97 197.74,44.93 JP80.3
MID14
  Bottom 0.406: JP90.SLEEVE 137.66,82.5 140.11,80.04 140.11,71.18 145.16,66.14 JP86.3
MID15
  Bottom 0.406: JP96.SLEEVE 190.23,82.5 192.69,80.04 192.69,71.18 197.74,66.14 JP92.3
N$1  (via drill 3.3)
  other vias: 4.38,17.34
N$2  (via drill 3.3)
  other vias: 48.7,4.38
N$3  (via drill 3.3)
  other vias: 56.96,17.34
N$4  (via drill 3.3)
  other vias: 101.28,4.38
N$5  (via drill 3.3)
  other vias: 4.38,38.54
N$6  (via drill 3.3)
  other vias: 48.7,25.59
N$7  (via drill 3.3)
  other vias: 56.96,38.54
N$8  (via drill 3.3)
  other vias: 101.28,25.59
N$9  (via drill 3.3)
  other vias: 109.54,17.34
N$10  (via drill 3.3)
  other vias: 153.86,4.38
N$11  (via drill 3.3)
  other vias: 162.12,17.34
N$12  (via drill 3.3)
  other vias: 206.44,4.38
N$13  (via drill 3.3)
  other vias: 109.54,38.54
N$14  (via drill 3.3)
  other vias: 153.86,25.59
N$15  (via drill 3.3)
  other vias: 162.12,38.54
N$16  (via drill 3.3)
  other vias: 206.44,25.59
N$17  (via drill 3.3)
  other vias: 4.38,59.75
N$18  (via drill 3.3)
  other vias: 48.7,46.8
N$19  (via drill 3.3)
  other vias: 56.96,59.75
N$20  (via drill 3.3)
  other vias: 101.28,46.8
N$21  (via drill 3.3)
  other vias: 4.38,80.96
N$22  (via drill 3.3)
  other vias: 48.7,68.01
N$23  (via drill 3.3)
  other vias: 56.96,80.96
N$24  (via drill 3.3)
  other vias: 101.28,68.01
N$25  (via drill 3.3)
  other vias: 109.54,59.75
N$26  (via drill 3.3)
  other vias: 153.86,46.8
N$27  (via drill 3.3)
  other vias: 162.12,59.75
N$28  (via drill 3.3)
  other vias: 206.44,46.8
N$29  (via drill 3.3)
  other vias: 109.54,80.96
N$30  (via drill 3.3)
  other vias: 153.86,68.01
N$31  (via drill 3.3)
  other vias: 162.12,80.96
N$32  (via drill 3.3)
  other vias: 206.44,68.01
RAW
  Top 0.406: JP2.1 JP1.1
RAW1
  Top 0.406: JP10.1 JP11.1
RAW2
  Top 0.406: JP16.1 JP17.1
RAW3
  Top 0.406: JP22.1 JP23.1
RAW4
  Top 0.406: JP28.1 JP29.1
RAW5
  Top 0.406: JP34.1 JP35.1
RAW6
  Top 0.406: JP40.1 JP41.1
RAW7
  Top 0.406: JP46.1 JP47.1
RAW8
  Top 0.406: JP52.1 JP53.1
RAW9
  Top 0.406: JP58.1 JP59.1
RAW10
  Top 0.406: JP64.1 JP65.1
RAW11
  Top 0.406: JP70.1 JP71.1
RAW12
  Top 0.406: JP76.1 JP77.1
RAW13
  Top 0.406: JP82.1 JP83.1
RAW14
  Top 0.406: JP88.1 JP89.1
RAW15
  Top 0.406: JP94.1 JP95.1
SHIELD
  Top 0.406: JP2.2 JP1.2
SHIELD1
  Top 0.406: JP10.2 JP11.2
SHIELD2
  Top 0.406: JP16.2 JP17.2
SHIELD3
  Top 0.406: JP22.2 JP23.2
SHIELD4
  Top 0.406: JP28.2 JP29.2
SHIELD5
  Top 0.406: JP34.2 JP35.2
SHIELD6
  Top 0.406: JP40.2 JP41.2
SHIELD7
  Top 0.406: JP46.2 JP47.2
SHIELD8
  Top 0.406: JP52.2 JP53.2
SHIELD9
  Top 0.406: JP58.2 JP59.2
SHIELD10
  Top 0.406: JP64.2 JP65.2
SHIELD11
  Top 0.406: JP70.2 JP71.2
SHIELD12
  Top 0.406: JP76.2 JP77.2
SHIELD13
  Top 0.406: JP82.2 JP83.2
SHIELD14
  Top 0.406: JP88.2 JP89.2
SHIELD15
  Top 0.406: JP94.2 JP95.2
SIG
  Top 0.406: JP6.3 JP5.3
SIG1
  Top 0.406: JP7.3 JP9.3
SIG2
  Top 0.406: JP13.3 JP15.3
SIG3
  Top 0.406: JP19.3 JP21.3
SIG4
  Top 0.406: JP25.3 JP27.3
SIG5
  Top 0.406: JP31.3 JP33.3
SIG6
  Top 0.406: JP37.3 JP39.3
SIG7
  Top 0.406: JP43.3 JP45.3
SIG8
  Top 0.406: JP49.3 JP51.3
SIG9
  Top 0.406: JP55.3 JP57.3
SIG10
  Top 0.406: JP61.3 JP63.3
SIG11
  Top 0.406: JP67.3 JP69.3
SIG12
  Top 0.406: JP73.3 JP75.3
SIG13
  Top 0.406: JP79.3 JP81.3
SIG14
  Top 0.406: JP85.3 JP87.3
SIG15
  Top 0.406: JP91.3 JP93.3
VCC
  Top 0.406: JP6.1 JP5.1
VCC1
  Top 0.406: JP7.1 JP9.1
VCC2
  Top 0.406: JP13.1 JP15.1
VCC3
  Top 0.406: JP19.1 JP21.1
VCC4
  Top 0.406: JP25.1 JP27.1
VCC5
  Top 0.406: JP31.1 JP33.1
VCC6
  Top 0.406: JP37.1 JP39.1
VCC7
  Top 0.406: JP43.1 JP45.1
VCC8
  Top 0.406: JP49.1 JP51.1
VCC9
  Top 0.406: JP55.1 JP57.1
VCC10
  Top 0.406: JP61.1 JP63.1
VCC11
  Top 0.406: JP67.1 JP69.1
VCC12
  Top 0.406: JP73.1 JP75.1
VCC13
  Top 0.406: JP79.1 JP81.1
VCC14
  Top 0.406: JP85.1 JP87.1
VCC15
  Top 0.406: JP91.1 JP93.1
VREF
  Bottom 0.406: JP4.1 24,1.97 22.73,3.24 22.73,16.83 22.87,16.97 JP3.RING
VREF1
  Bottom 0.406: JP8.1 76.58,1.97 75.31,3.24 75.31,16.83 75.45,16.97 JP12.RING
VREF2
  Bottom 0.406: JP14.1 24,23.18 22.73,24.45 22.73,38.04 22.87,38.18 JP18.RING
VREF3
  Bottom 0.406: JP20.1 76.58,23.18 75.31,24.45 75.31,38.04 75.45,38.18 JP24.RING
VREF4
  Bottom 0.406: JP26.1 129.16,1.97 127.89,3.24 127.89,16.83 128.03,16.97 JP30.RING
VREF5
  Bottom 0.406: JP32.1 181.74,1.97 180.47,3.24 180.47,16.83 180.61,16.97 JP36.RING
VREF6
  Bottom 0.406: JP38.1 129.16,23.18 127.89,24.45 127.89,38.04 128.03,38.18 JP42.RING
VREF7
  Bottom 0.406: JP44.1 181.74,23.18 180.47,24.45 180.47,38.04 180.61,38.18 JP48.RING
VREF8
  Bottom 0.406: JP50.1 24,44.39 22.73,45.66 22.73,59.25 22.87,59.39 JP54.RING
VREF9
  Bottom 0.406: JP56.1 76.58,44.39 75.31,45.66 75.31,59.25 75.45,59.39 JP60.RING
VREF10
  Bottom 0.406: JP62.1 24,65.6 22.73,66.87 22.73,80.46 22.87,80.6 JP66.RING
VREF11
  Bottom 0.406: JP68.1 76.58,65.6 75.31,66.87 75.31,80.46 75.45,80.6 JP72.RING
VREF12
  Bottom 0.406: JP74.1 129.16,44.39 127.89,45.66 127.89,59.25 128.03,59.39 JP78.RING
VREF13
  Bottom 0.406: JP80.1 181.74,44.39 180.47,45.66 180.47,59.25 180.61,59.39 JP84.RING
VREF14
  Bottom 0.406: JP86.1 129.16,65.6 127.89,66.87 127.89,80.46 128.03,80.6 JP90.RING
VREF15
  Bottom 0.406: JP92.1 181.74,65.6 180.47,66.87 180.47,80.46 180.61,80.6 JP96.RING

## Text on the board
Top: v10 | v10 | v10 | v10 | v10 | v10 | v10 | v10 | v10 | v10 | v10 | v10 | v10 | v10 | v10 | v10
tPlace: RAW | + | RAW | + | RAW | + | RAW | + | SHLD | - | SHLD | - | SHLD | - | SHLD | - | GND | SIG | GND | SIG | GND | SIG | GND | SIG | R | E | M | R | E | M | R | E | M | R | E | M | Cable Shield | Cable Shield | Cable Shield | Cable Shield | RAW | + | RAW | + | RAW | + | RAW | + | SHLD | - | SHLD | - | SHLD | - | SHLD | - | GND | SIG | GND | SIG | GND | SIG | GND | SIG | R | E | M | R | E | M | R | E | M | R | E | M | Cable Shield | Cable Shield | Cable Shield | Cable Shield | RAW | + | RAW | + | RAW | + | RAW | + | SHLD | - | SHLD | - | SHLD | - | SHLD | - | GND | SIG | GND | SIG | GND | SIG | GND | SIG | R | E | M | R | E | M | R | E | M | R | E | M | Cable Shield | Cable Shield | Cable Shield | Cable Shield | RAW | + | RAW | + | RAW | + | RAW | + | SHLD | - | SHLD | - | SHLD | - | SHLD | - | GND | SIG | GND | SIG | GND | SIG | GND | SIG | R | E | M | R | E | M | R | E | M | R | E | M | Cable Shield | Cable Shield | Cable Shield | Cable Shield
bPlace: RAW | + | RAW | + | RAW | + | RAW | + | SHLD | - | SHLD | - | SHLD | - | SHLD | - | GND | SIG | GND | SIG | GND | SIG | GND | SIG | R | E | M | R | E | M | R | E | M | R | E | M | RAW | + | RAW | + | RAW | + | RAW | + | SHLD | - | SHLD | - | SHLD | - | SHLD | - | GND | SIG | GND | SIG | GND | SIG | GND | SIG | R | E | M | R | E | M | R | E | M | R | E | M | RAW | + | RAW | + | RAW | + | RAW | + | SHLD | - | SHLD | - | SHLD | - | SHLD | - | GND | SIG | GND | SIG | GND | SIG | GND | SIG | R | E | M | R | E | M | R | E | M | R | E | M | RAW | + | RAW | + | RAW | + | RAW | + | SHLD | - | SHLD | - | SHLD | - | SHLD | - | GND | SIG | GND | SIG | GND | SIG | GND | SIG | R | E | M | R | E | M | R | E | M | R | E | M
Measures: All units in inches
tDocu: Brian E Kaminski of Advancer Technologies | Revised by: Brent Wilkins